# Altium PCB GR_Pi.PcbDoc
Units mm, origin at the board's own origin, x right, y up, seen from the top; angles counter-clockwise.
Board outline 28 x 54 mm, 2 copper layers (Top Layer, Bottom Layer); 23 components, 20 nets, 96 pads, 19 vias.
Unrouted connection lines stored in the file: 1.
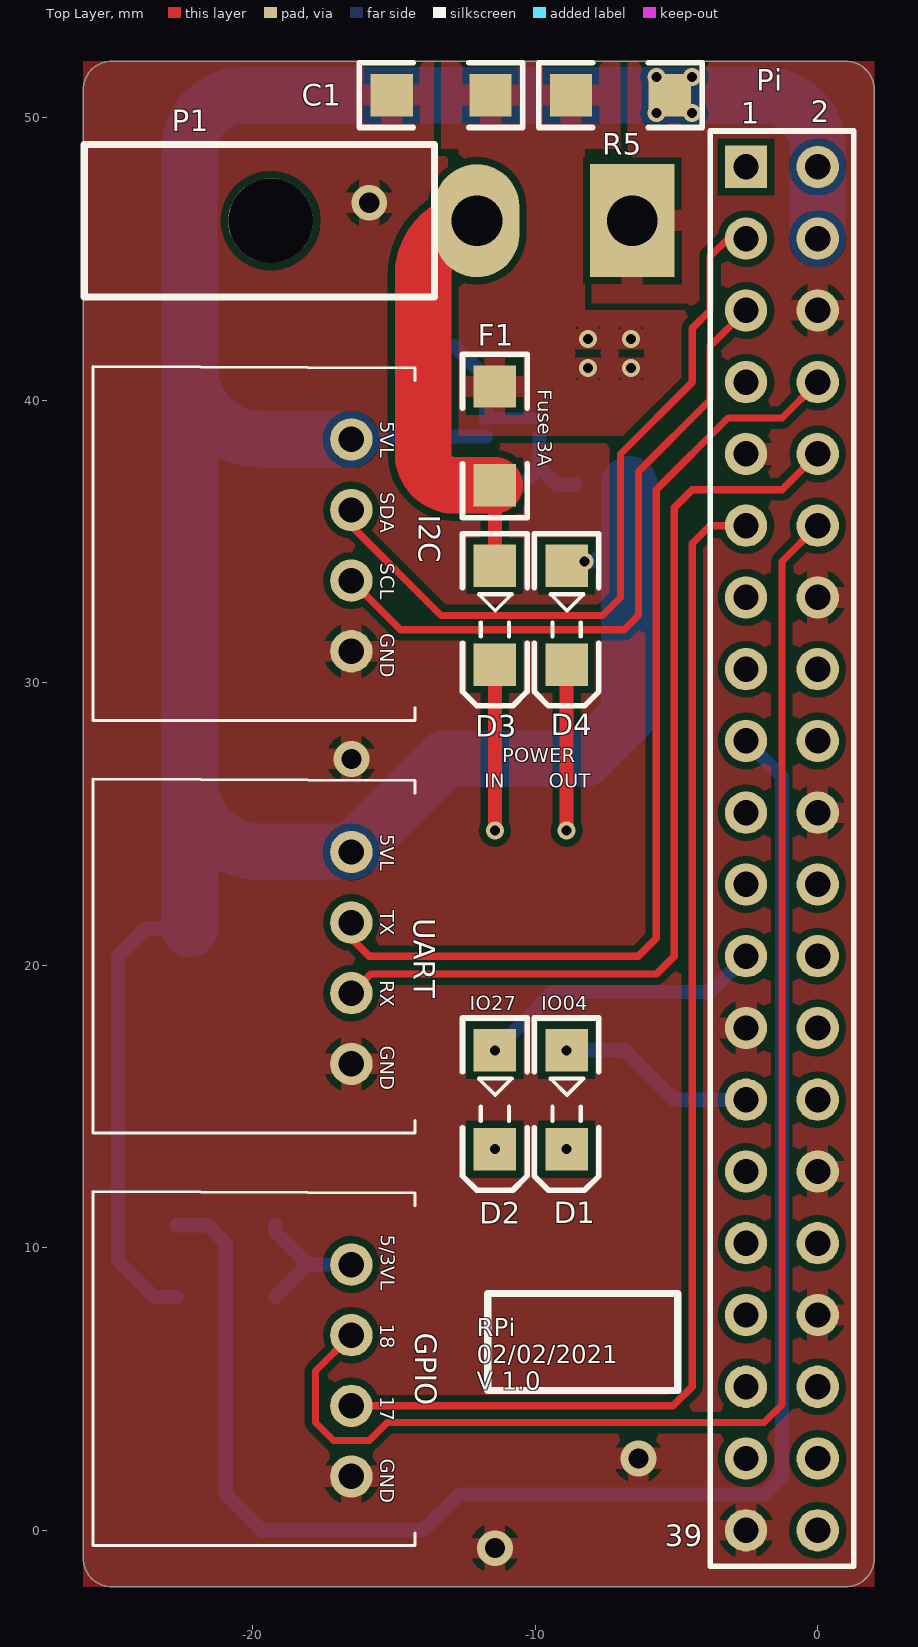
[diagram p0: Top Layer view]
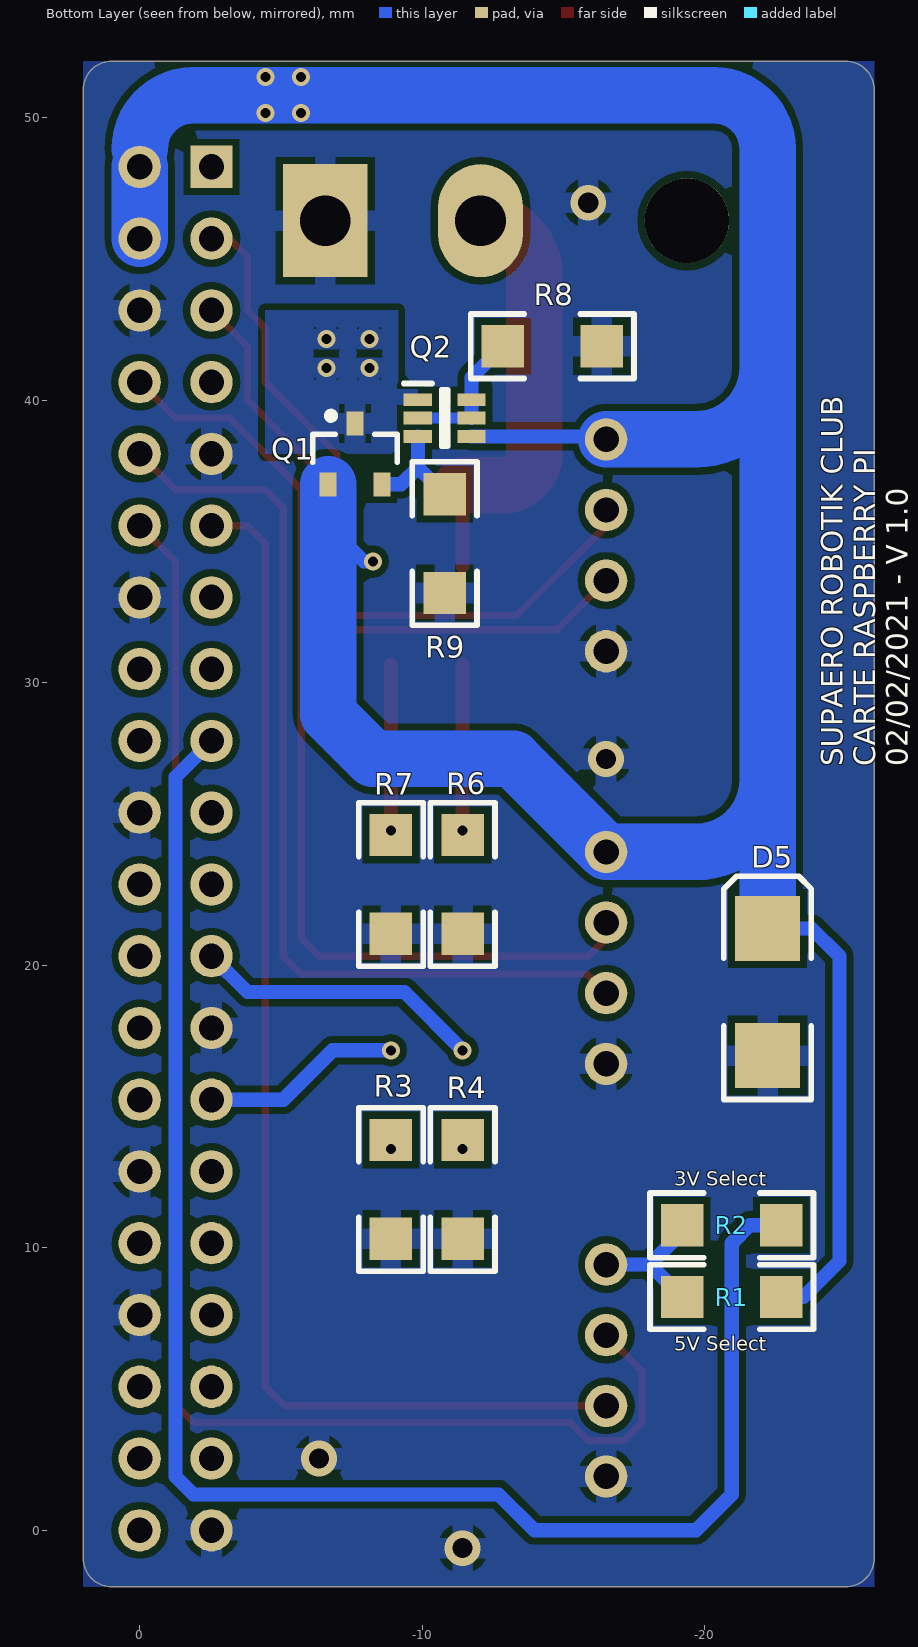
[diagram p1: Bottom Layer view, seen from below]
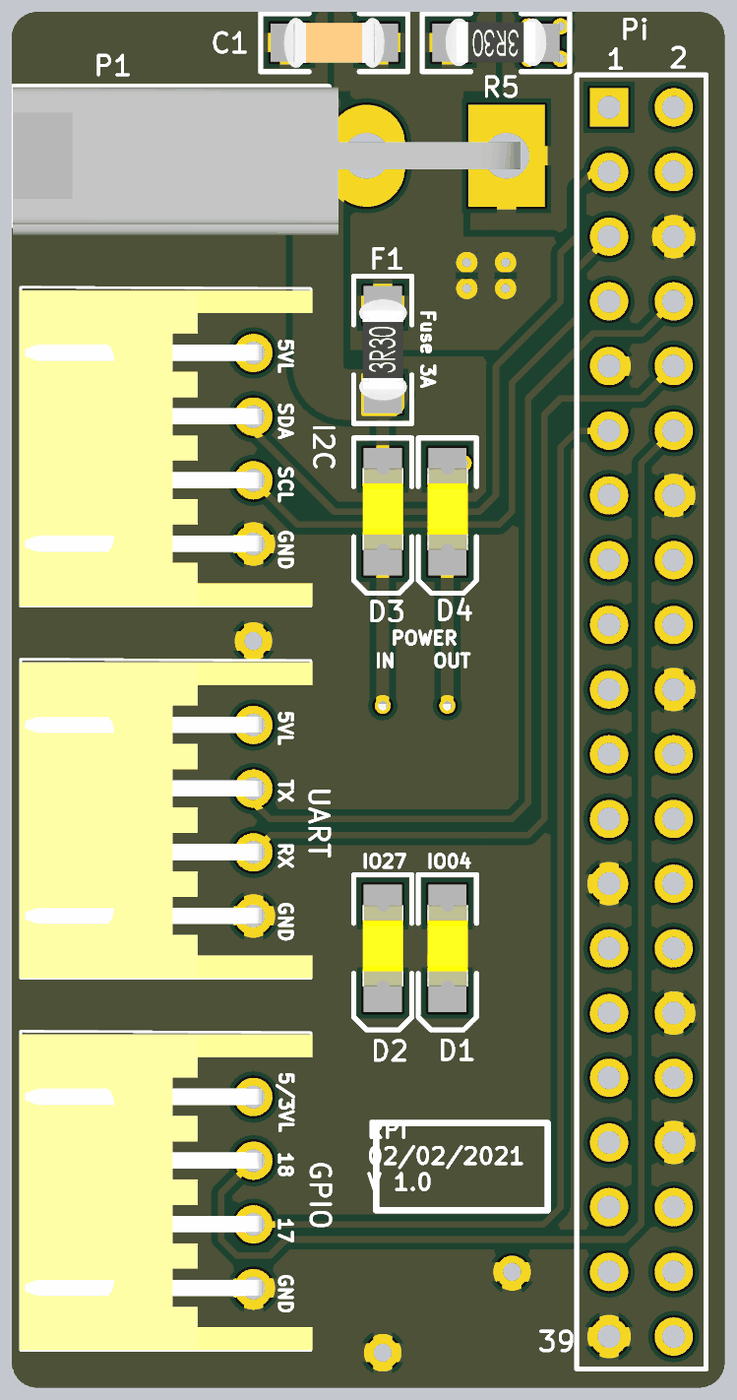
[diagram p2: 3D render of the assembled board from above, using the file's embedded part models]
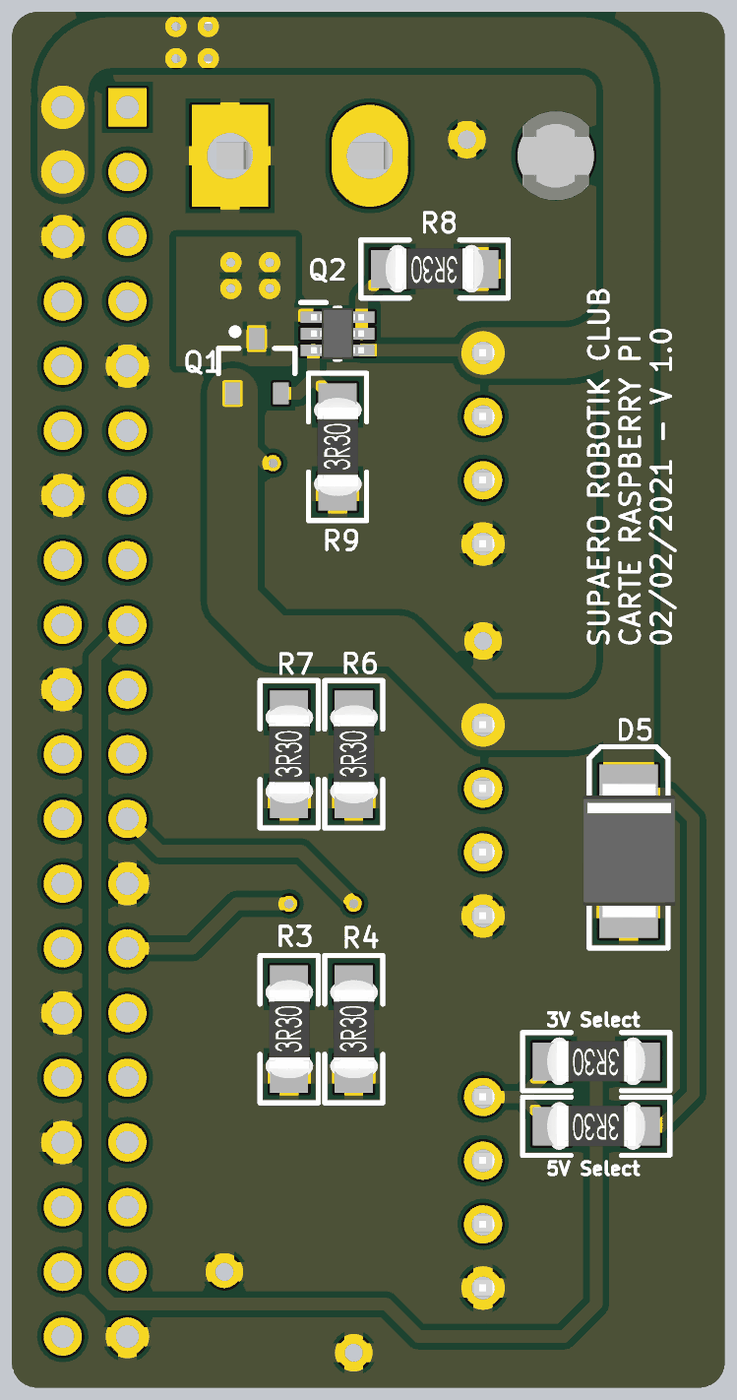
[diagram p3: 3D render of the assembled board from below, using the file's embedded part models]

## Layer stack, top to bottom
Top Solder: solder mask 0.0102, Solder Resist, Dk 3.5
Top Layer: signal copper 0.0356
Dielectric 1: dielectric 0.32, FR-4, Dk 4.8
Bottom Layer: signal copper 0.0356
Bottom Solder: solder mask 0.0102, Solder Resist, Dk 3.5

## Board outline
-26,24 -26,51 cw(c-25,51) -25,52 1,52 cw(c1,51) 2,51 2,-1 cw(c1,-1) 1,-2 -25,-2 cw(c-25,-1) -26,-1

## Design rules (kind name [scope] priority, off if disabled: settings)
Clearance [All] p1: gap=0.254 except(0.127: Track-Track Track-SMDPad SMDPad-SMDPad)
ComponentClearance ComponentClearance_1 [HasFootprint('HDR2X20')] p1: gap=0 collisioncheckmode=3 verticalgap=0 showdistances=FALSE
ComponentClearance [All] p2: gap=0.254 collisioncheckmode=3 verticalgap=0.254 showdistances=FALSE
PolygonConnect [All] p1: connectstyle=Relief reliefconductorwidth=0.75 reliefentries=4 polygonreliefangle="90 Angle" airgapwidth=0.254
RoutingVias [All] p1: holewidth=0.711 width=1.27 viastyle="Through Hole" minholewidth=0.711 minwidth=1.27 maxholewidth=0.711 maxwidth=1.27
SolderMaskExpansion [All] p1: expansion=0.102
Width [All] p1: maxlimit=2 minlimit=0.254 preferedwidth=0.5
29 further rules are at their usual default settings.

## Components (designator, comment, footprint, x,y, rotation, side; value= is the part's Value field where it differs from the comment)
C1 "Cap" "Capacitor 1206" -13.335,50.8 r0 top
D1 "GPIO_4" KP-3216SEC -8.89,15.24 r270 top
D2 "GPIO_27" KP-3216SEC -11.43,15.24 r270 top
D3 "5V_IN" KP-3216SEC -11.43,32.385 r270 top
D4 "5V_L" KP-3216SEC -8.89,32.385 r270 top
D5 "SMBJ5.0A" SMB -22.225,19.05 r0 bottom
F1 "3A" "Resistor 1206" -11.43,38.735 r90 top
GPIO "Header 4H" S4B-XH-A -16.51,1.905 r90 top locked
I2C "Header 4H" S4B-XH-A -16.51,31.115 r90 top locked
P1 "Header 2H" Molex_MiniFitJr_2x1H -12.065,46.355 r180 top locked
Pi "Header 20X2" HDR2X20 -2.54,48.26 r270 top locked
Q1 "DMG2305UX" SOT23_L -7.62,38.1 r90 bottom
Q2 "BCM857BS" SOT65P210X110-6N -10.795,39.37 r180 bottom
R1 "Res2" "Resistor 1206" -20.955,8.255 r0 bottom
R2 "Res2" "Resistor 1206" -20.955,10.795 r0 bottom
R3 "Res2" "Resistor 1206" -8.89,12.065 r90 bottom
R4 "Res2" "Resistor 1206" -11.43,12.065 r90 bottom
R5 "Res2" "Resistor 1206" -6.985,50.8 r180 top
R6 "Res2" "Resistor 1206" -11.43,22.86 r90 bottom
R7 "Res2" "Resistor 1206" -8.89,22.86 r90 bottom
R8 "Res2" "Resistor 1206" -14.605,41.91 r0 bottom
R9 "Res2" "Resistor 1206" -10.795,34.925 r90 bottom
UART "Header 4H" S4B-XH-A -16.51,16.51 r90 top locked

## Footprints (in the part's own frame and the unit in brackets; to place one, negate y for a bottom-side part, rotate by r counter-clockwise, add the part's x,y. Pads: shape width x height; smd on the part's side, far side on the other; paste and mask are expansions set on the pad)
"Capacitor 1206" [mm]
  rect 1.5x1.5 smd: 1(-1.75,0) 2(1.75,0)
  silkscreen extent -2.89,-1.14 2.89,1.14, body extent -1.98,-0.99 1.98,0.96, height 1.3
HDR2X20 [mm] "Connector; Header; 20x2 Position"
  rect 1.5x1.5 hole 0.9: 1(0,0)
  round 1.5 hole 0.9: 2(0,2.54) 3(2.54,0) 4(2.54,2.54) 5(5.08,0) 6(5.08,2.54) 7(7.62,0) 8(7.62,2.54) 9(10.16,0) 10(10.16,2.54) 11(12.7,0) 12(12.7,2.54) 13(15.24,0) 14(15.24,2.54) 15(17.78,0) 16(17.78,2.54) 17(20.32,0) 18(20.32,2.54) 19(22.86,0) 20(22.86,2.54) 21(25.4,0) 22(25.4,2.54) 23(27.94,0) 24(27.94,2.54) 25(30.48,0) 26(30.48,2.54) 27(33.02,0) 28(33.02,2.54) 29(35.56,0) 30(35.56,2.54) 31(38.1,0) 32(38.1,2.54) 33(40.64,0) 34(40.64,2.54) 35(43.18,0) 36(43.18,2.54) 37(45.72,0) 38(45.72,2.54) 39(48.26,0) 40(48.26,2.54)
  silkscreen extent -1.27,-1.27 49.53,3.81
KP-3216SEC [mm]
  rect 1.5x1.5 smd: 1(-1.75,0) 2(1.75,0)
  silkscreen extent -2.89,-1.14 3.2,1.14, body extent -1.7,-0.79 1.5,0.81, height 1.1
Molex_MiniFitJr_2x1H [mm] "Connecteur Molex 2"
  rect 3x4 hole 1.8: 1(-5.5,0)
  oval 3x4 hole 1.8: 2(0,0)
  round 3 hole 3 unplated: 3(7.3,0)
  silkscreen extent 1.5,-2.7 13.9,2.7, body extent -6.03,-2.7 13.9,3.1, height 11.01
"Resistor 1206" [mm]
  rect 1.5x1.5 smd: 1(-1.75,0) 2(1.75,0)
  silkscreen extent -2.89,-1.14 2.89,1.14, body extent -1.98,-0.95 1.98,0.93, height 0.55
S4B-XH-A [mm]
  round 1.5 hole 0.9: 1(0,0) 2(2.5,0) 3(5,0) 4(7.5,0)
  silkscreen extent -2.45,-2.26 10.08,9.14, body extent -2.44,-2.32 9.96,9.18, height 6.15
SMB [mm] "SMB Didoe"
  rect 2.3x2.3 smd: 1(0,2.25) 2(0,-2.25)
  silkscreen extent -1.55,-4.1 1.55,3.8, body extent -1.84,-2.67 1.78,2.62, height 2.2
SOT23_L [mm] "SOT23, 3-Leads, Body 2.9x1.3mm, Pitch 0.95mm, Lead Span 2.3mm - Reverse Pinning, IPC High Density"
  rect 0.85x0.6 smd: 1(1.075,0) 2(-1.075,-0.95) 3(-1.075,0.95)
  silkscreen extent -0.3,-1.5 1.47,1.5, body extent -0.7,-1.5 0.7,1.5, height 1.1
SOT65P210X110-6N [mm]
  rect 1x0.45 smd: 1(-0.95,0.65) 2(-0.95,0) 3(-0.95,-0.65) 4(0.95,-0.65) 5(0.95,0) 6(0.95,0.65)
  silkscreen extent -1.45,-1 0.1,1.22, body extent -1.05,-1 1.05,1, height 1.1

## Part data
C1: "Capacitor"
D1 D2 D3 D4: library part LED2, "Typical RED, GREEN, YELLOW, AMBER GaAs LED"
D5: library part "D Zener", "Zener Diode"
F1: library part "Fuse 2", "Fuse"
GPIO I2C UART: "Header, 4-Pin, Right Angle"
P1: "Header, 2-Pin, Right Angle"
Pi: "Header, 20-Pin, Dual row"
Q1: library part MOSFET-P, "P-Channel MOSFET"
Q2: "Transistor"
R1 R2 R3 R4 R5 R6 R7 R8 R9: "Resistor"

## Via types
v1: diameter 0.635, hole 0.356, Top Layer to Bottom Layer, 15 vias
v2: diameter 1.27, hole 0.711, Top Layer to Bottom Layer, 4 vias

## Nets (pads, with @x,y where several pads share a name; then routed paths per layer and width w, separated by ;. In a path a pad name is that pad's centre, name@x,y a point inside that pad or via, vN(x,y) a via of type N, cw(c..) or ccw(c..) an arc to the next point about the centre after c; other vN are vias at no path point)
3V3_L: Pi.1 Pi.17 R2.1 | length 58.5
  Bottom Layer w0.5: R2.1 -21.59,10.795 -20.955,10.16 -20.955,1.27 -19.685,0 -13.97,0 -12.7,1.27 -1.905,1.27 -1.27,1.905 -1.27,26.67 Pi.17
5V_IN: D3.1 F1.1 P1.2 | length 15.4
  Top Layer w0.5: D3.1 F1.1
  Top Layer w2: P1.2 ccw(c-12.065,44.45) -13.97,44.45 -13.97,38.1 ccw(c-12.855,38.1) -12.855,36.985 F1.1
5V_L: D4.1 D5.2 I2C.4 Pi.2 Pi.4 Q1.3 Q2.4 R1.1 R5.1 UART.4 | length 112.1
  Bottom Layer w0.5: R1.1 -23.495,8.255 -24.765,9.525 -24.765,20.32 -23.785,21.3 D5.2 ; I2C.4 -16.405,38.72 Q2.4 ; v1(-8.255,34.29) -7.94,34.29 -6.67,35.56
  Bottom Layer w2: D5.2 -22.225,26.55 ; I2C.4 -19.685,38.615 cw(c-19.685,41.155) -22.225,41.155 ; Q1.3 -6.67,35.56 -6.67,28.89 -8.255,27.305 -13.215,27.305 UART.4 -19.685,24.01 cw(c-19.685,26.55) -22.225,26.55 ; Pi.4 Pi.2 ; Pi.2@0,48.895 ccw(c-1.905,48.895) -1.905,50.8 -20.32,50.8 ccw(c-20.32,48.895) -22.225,48.895 -22.225,41.155 ; -22.225,26.55 -22.225,41.155
  other v1: -5.715,50.165 -4.445,50.165 -5.715,51.435 -4.445,51.435
GND: C1.1 D5.1 GPIO.1 I2C.1 P1.1 Pi.6 Pi.9 Pi.14 Pi.20 Pi.25 Pi.30 Pi.34 Pi.39 R3.1 R4.1 R6.1 R7.1 R8.1 R9.1 UART.1
  other v2: -11.43,-0.635 -6.35,2.54 -16.51,27.305 -15.875,46.99
NetC1_2: C1.2 F1.2 Q1.1 Q2.1 R5.2
  other v1: -8.128,41.148 -6.604,41.148 -8.128,42.164 -6.604,42.164
NetD1_2: D1.2 R3.2
  other v1: -8.89,13.49
NetD2_2: D2.2 R4.2
  other v1: -11.43,13.49
NetD3_2: D3.2 R6.2 | length 5.9
  Top Layer w0.5: v1(-11.43,24.765) D3.2
NetD4_2: D4.2 R7.2 | length 5.9
  Top Layer w0.5: v1(-8.89,24.765) D4.2
NetGPIO_4: GPIO.4 R1.2 R2.2 | length 5
  Bottom Layer w0.5: R1.2 -18.055,9.405 ; R2.2 -19.205,10.555 -18.055,9.405 ; GPIO.4 -18.055,9.405
NetQ1_2: Q1.2 Q2.3 R9.2 | length 4
  Bottom Layer w0.5: R9.2 -9.845,37.625 ; Q2.3 -9.845,37.625 ; Q1.2 -9.245,37.025 -9.845,37.625
NetQ2_2: Q2.2 Q2.5 Q2.6 R8.2 | length 4.9
  Bottom Layer w0.381: Q2.5 Q2.2
  Bottom Layer w0.5: R8.2 -11.745,40.8 Q2.6 Q2.5
T_GPIO_4: D1.1 Pi.27 | length 7.1
  Bottom Layer w0.5: v1(-8.89,16.99) -6.83,16.99 -5.08,15.24 Pi.27
T_GPIO_17: GPIO.2 Pi.11 | length 44.4
  Top Layer w0.254: GPIO.2 -5.12,4.405 -4.445,5.08 -4.445,34.925 -3.81,35.56 Pi.11
T_GPIO_18: GPIO.3 Pi.12 | length 52.6
  Top Layer w0.254: GPIO.3 -17.78,5.635 -17.78,3.81 -17.145,3.175 -15.875,3.175 -15.24,3.81 -1.905,3.81 -1.27,4.445 -1.27,34.29 Pi.12
T_GPIO_27: D2.1 Pi.23 | length 10.3
  Bottom Layer w0.5: v1(-11.43,16.99) -9.37,19.05 -3.81,19.05 Pi.23
T_I2C_SCL: I2C.2 Pi.5 | length 23.5
  Top Layer w0.254: I2C.2 -14.772,31.877 -6.858,31.877 -6.35,32.385 -6.35,37.465 -3.81,40.005 -3.81,41.91 Pi.5
T_I2C_SDA: I2C.3 Pi.3 | length 26.6
  Top Layer w0.254: I2C.3 -16.51,35.56 -13.335,32.385 -7.62,32.385 -6.985,33.02 -6.985,38.1 -4.445,40.64 -4.445,42.545 -3.81,43.18 -3.81,45.085 -3.175,45.72 Pi.3
T_UART_RX: Pi.10 UART.2 | length 33.7
  Top Layer w0.254: UART.2 -15.835,19.685 -5.715,19.685 -5.08,20.32 -5.08,36.195 -4.445,36.83 -1.27,36.83 Pi.10
T_UART_TX: Pi.8 UART.3 | length 35
  Top Layer w0.254: UART.3 -16.51,20.955 -15.875,20.32 -6.35,20.32 -5.715,20.955 -5.715,36.83 -3.175,39.37 -1.27,39.37 Pi.8
pads on no net: P1.3 Pi.7 Pi.13 Pi.15 Pi.16 Pi.18 Pi.19 Pi.21 Pi.22 Pi.24 Pi.26 Pi.28 Pi.29 Pi.31 Pi.32 Pi.33 Pi.35 Pi.36 Pi.37 Pi.38 Pi.40

## Polygon pours and split planes (outlines as drawn)
NetC1_2 on Bottom Layer "Bot 5VL" (solid, pour order 0): -10.16,38.1 -4.445,38.1 -4.445,43.18 -9.144,43.18 -9.144,40.64 -10.16,40.64
GND on Bottom Layer "GND_L02_P007" (solid, remove dead copper, pour order 7): -26,52 2,52 2,-2 -26,-2
NetC1_2 on Top Layer "Top 5VL" (solid, remove dead copper, pour order 4): -12.7,38.735 -4.445,38.735 -4.445,43.18 -8.255,43.18 -8.255,48.895 -6.985,48.895 -6.985,52 -13.335,52 -13.335,48.895 -10.16,48.895 -12.7,48.895
GND on Top Layer "Top GND" (solid, remove dead copper, pour order 5): -26,52 2,52 2,-2 -26,-2

## Silkscreen, mask and mechanical layers (free items; w line width, h text height)
Top Overlay:
  lines w0.254: -11.684,4.953 -11.684,8.382 -4.953,8.382 -4.953,4.953 -11.684,4.953
  text "Fuse 3A" at -9.906,40.386 h0.51 r270
  text "5VL" at -15.494,39.25 h0.51 r270
  text "SDA" at -15.494,36.75 h0.51 r270
  text "SCL" at -15.494,34.25 h0.51 r270
  text "GND" at -15.494,31.75 h0.51 r270
  text "POWER" at -11.176,27.178 h0.51
  text "IN" at -11.811,26.289 h0.51
  text "OUT" at -9.525,26.289 h0.51
  text "5VL" at -15.494,24.645 h0.51 r270
  text "TX" at -15.494,21.942 h0.51 r270
  text "RX" at -15.494,19.467 h0.51 r270
  text "IO27" at -12.319,18.415 h0.51
  text "IO04" at -9.779,18.415 h0.51
  text "GND" at -15.494,17.145 h0.51 r270
  text "5/3VL" at -15.469,10.465 h0.51 r270
  text "18" at -15.494,7.311 h0.51 r270
  text "RPi / 02/02/2021 / V 1.0" at -12.064,4.968 h0.64
  text "17" at -15.494,4.735 h0.51 r270
  text "GND" at -15.494,2.54 h0.51 r270
Bottom Overlay:
  text "SUPAERO ROBOTIK CLUB / CARTE RASPBERRY PI / 02/02/2021 - V 1.0" at -27.178,27.051 h0.76 r270
  text "3V Select" at -18.923,12.192 h0.51
  text "5V Select" at -18.923,6.35 h0.51
Mechanical 2:
  lines w0.254: -26,-0.73 ccw(c-24.73,-0.73) -24.73,-2 -15,-2 0.73,-2 ccw(c0.73,-0.73) 2,-0.73 2,50.73 ccw(c0.73,50.73) 0.73,52 -14,52 -24.73,52 ccw(c-24.73,50.73) -26,50.73 -26,-0.73

## Text inside footprints (layer, text, board x,y; h text height)
Pi: Top Overlay "1" at -2.718,49.784 h0.76; Top Overlay "2" at -0.254,49.835 h0.76; Top Overlay "39" at -5.41,-0.559 h0.76